# Altium PCB 3PDT.PcbDoc
Units mil, origin at the board's own origin, x right, y up, seen from the top; angles counter-clockwise.
Board outline 1450 x 736.25 mil, 2 copper layers (Top Layer, Bottom Layer); 2 components, 8 nets, 21 pads, 0 vias.
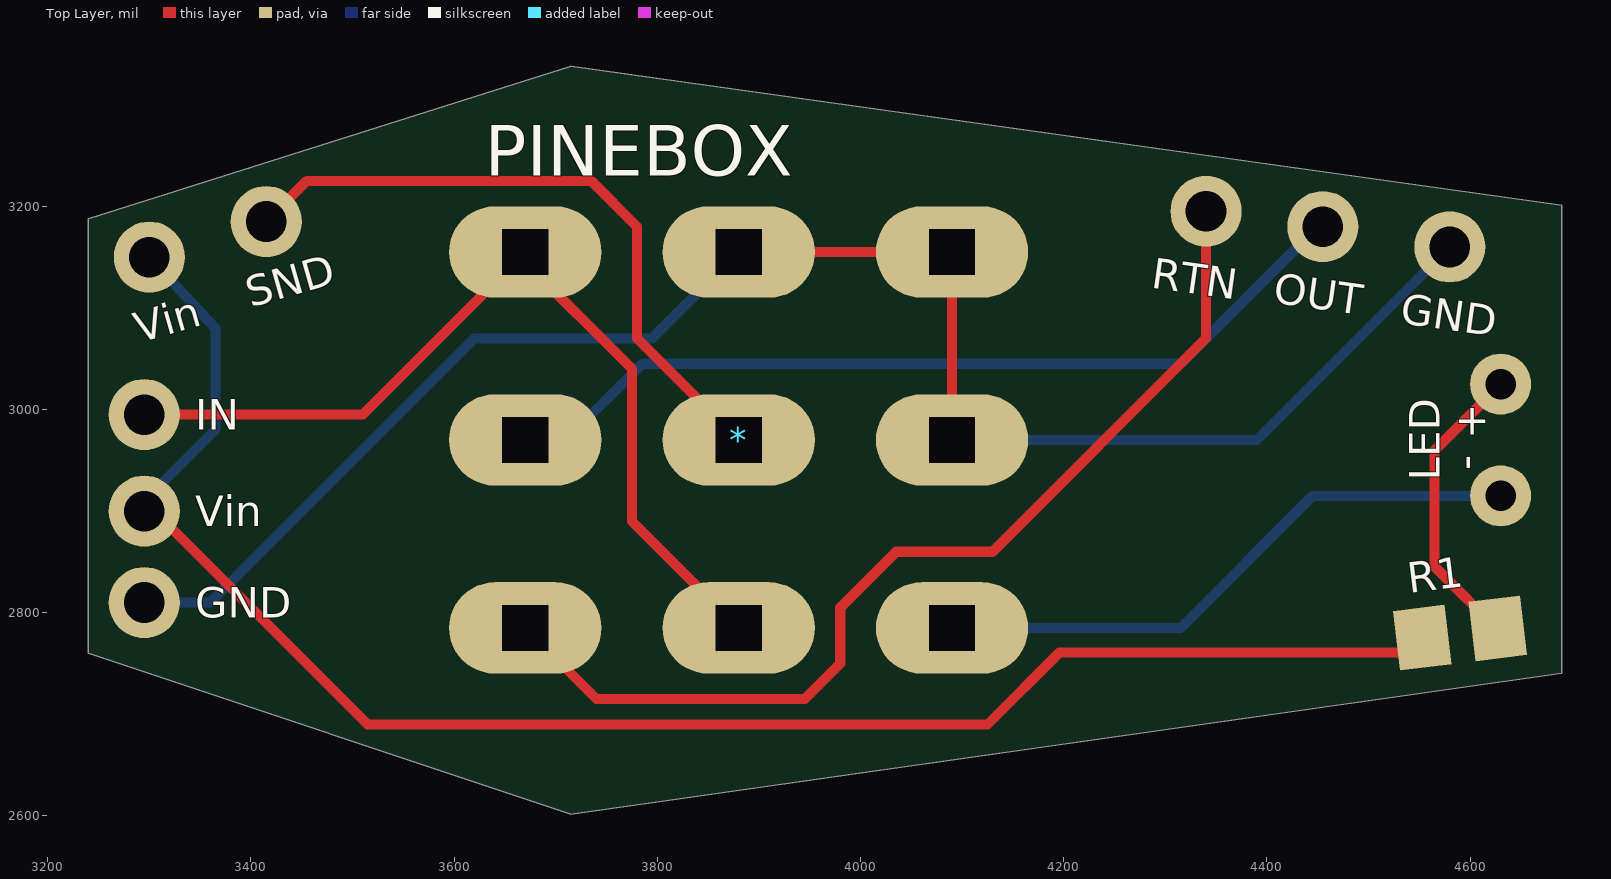
[diagram p0: Top Layer view]
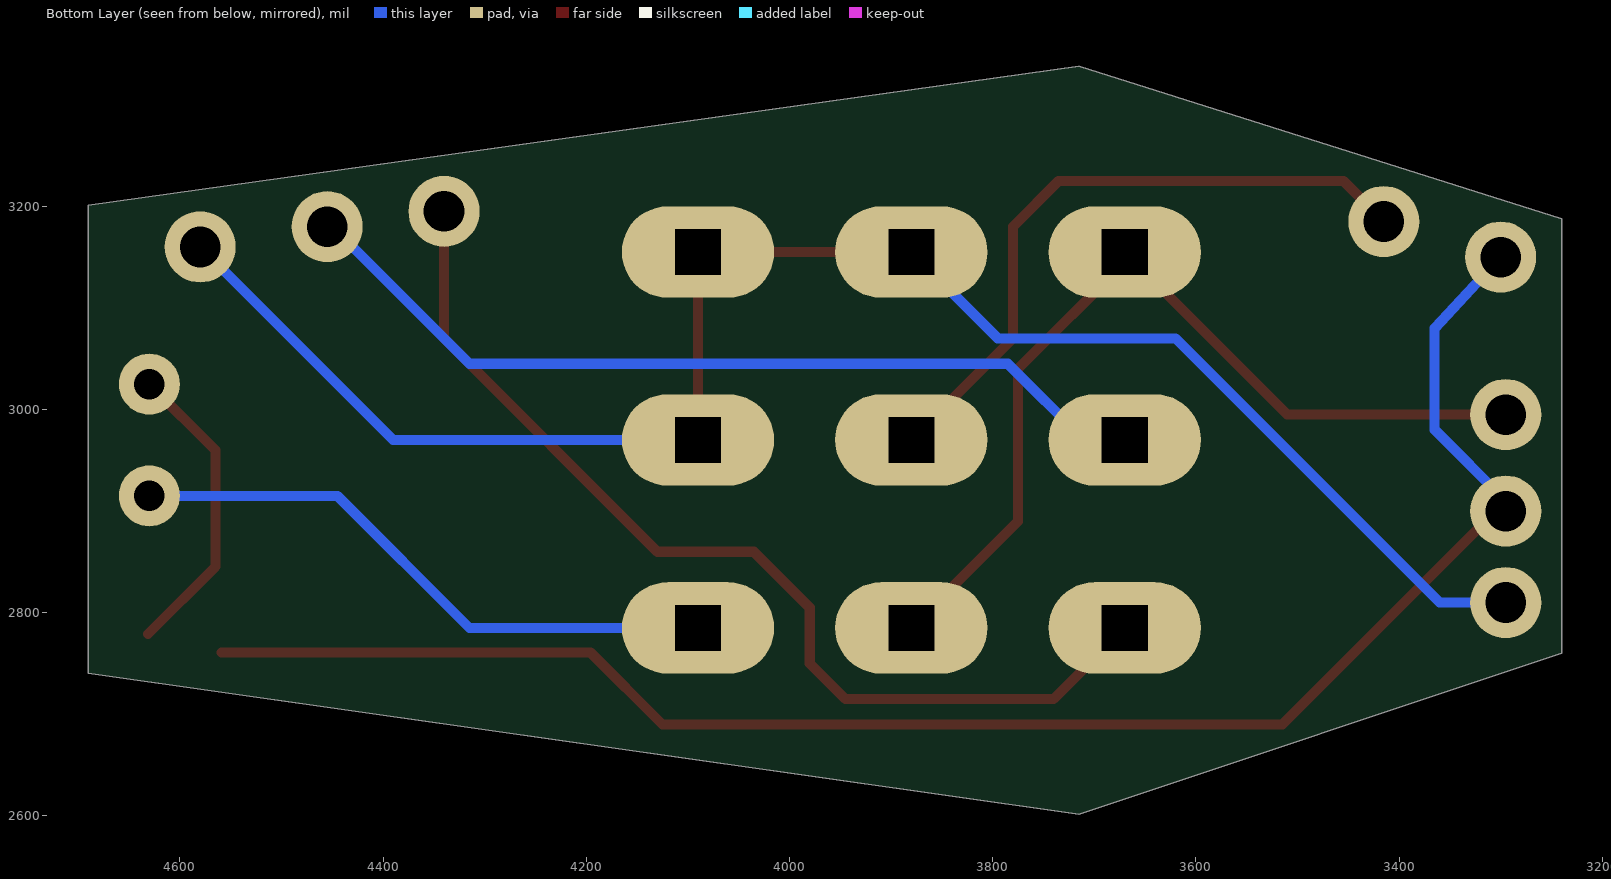
[diagram p1: Bottom Layer view, seen from below]

## Layer stack, top to bottom
Top Solder: solder mask 0.4, Solder Resist, Dk 3.5
Top Layer: signal copper 1.4
Dielectric 1: dielectric 12.6, FR-4, Dk 4.8
Bottom Layer: signal copper 1.4
Bottom Solder: solder mask 0.4, Solder Resist, Dk 3.5

## Board outline
4690,3201.23 3715,3337.68 3240,3187.92 3240,2760.27 3715,2601.42 4690,2740.54

## Design rules (kind name [scope] priority, off if disabled: settings)
Clearance [All] p1: gap=10 ignorepadtopadclearanceinfootprint=FALSE except(0: Arc-Hole Track-Hole SMDPad-Hole THPad-Hole Via-Hole Fill-Hole Poly-Hole Region-Hole Text-Hole)
Height [All] p1: minheight=0 maxheight=5000 prefheight=500
PolygonConnect [All] p1: connectstyle=Relief reliefconductorwidth=10 reliefentries=4 polygonreliefangle="90 Angle" airgapwidth=10
RoutingVias [All] p1: holewidth=28 width=50 viastyle="Through Hole" minholewidth=28 minwidth=50 maxholewidth=28 maxwidth=50
SolderMaskExpansion [All] p1: expansion=4
Width [All] p1: maxlimit=10 minlimit=10 preferedwidth=10
29 further rules are at their usual default settings.

## Components (designator, comment, footprint, x,y, rotation, side; value= is the part's Value field where it differs from the comment)
* "3PDT" 3PDT 3880,3155 r180 top
R1 "ERA6Y" ERA-0805 4590,2780 r187 top

## Footprints (in the part's own frame and the unit in brackets; to place one, negate y for a bottom-side part, rotate by r counter-clockwise, add the part's x,y. Pads: shape width x height; smd on the part's side, far side on the other; paste and mask are expansions set on the pad)
3PDT [mil]
  oval 150x90 hole 45 square: 1(-210,370) 2(-210,185) 3(-210,0) 4(0,370) 5(0,185) 6(0,0) 7(210,370) 8(210,185) 9(210,0)
  body extent -387,-150 385,520, height 1567
ERA-0805 [mm] "Chip Resistor; Body 2 x 1.3 mm (LxW typ)"
  rect 1.3x1.5 smd: 1(-0.95,0) 2(0.95,0)

## Part data
R1: "Rectangular Thick Film Chip Resistor, 10 Ohm to 1M Ohm Range, 0.1% and 0.5% Tolerance, 0805 Size, 0.1 W", PackageDocument=Mar-2003, Code_IPC="2012 [0805]", ComponentLink1Description="Manufacturer Link", ComponentLink1URL=http://www.panasonic.com/industrial/components/resistive_products.htm, ComponentLink2Description=Datasheet, ComponentLink2URL=http://www.panasonic.com/industrial/components/pdf/AOA0000CE8.pdf, LatestRevisionDate=19-Mar-2004, LatestRevisionNote="Silkscreen size reduced.", Note="If flow soldering, adjust pad width of PCB Footprint to 0.7 - 0.8 times the width of the resistor.", PackageReference=ERA-0805, Published=17-Dec-2003, Publisher="Altium Limited"

## Free pads (board coordinates)
  round 70 hole 40: 6(3295,2810) 6(3295,2900) 6(3295,2995) 6(3300,3150) 6(3415,3185) 6(4340,3195) 6(4455,3180) 6(4580,3160)
  round 60 hole 30: 7(4630,2915) 8(4630,3025)

## Nets (pads, with @x,y where several pads share a name; then routed paths per layer and width w, separated by ;. In a path a pad name is that pad's centre, name@x,y a point inside that pad or via, vN(x,y) a via of type N, cw(c..) or ccw(c..) an arc to the next point about the centre after c; other vN are vias at no path point)
GND: *.2 *.3 *.6 pad.6@3295,2810 pad.6@4580,3160 | length 1712
  Top Layer w10: *.6 *.3 *.2
  Bottom Layer w10: pad.6@3295,2825 3310,2810 3360,2810 3620,3070 3795,3070 *.6 ; *.2 4390,2970 4580,3160 pad.6@4590,3170
IN: *.4 *.9 pad.6@3295,2995 | length 898.3
  Top Layer w10: pad.6@3295,2995 3510,2995 *.9 3670,3145 3775,3040 3775,2890 *.4
LED+: pad.8 R1.1 | length 300.3
  Top Layer w10: pad.8 4565,2960 4565,2845.34 R1.1@4631.29,2779.05
LED-: *.1 pad.7 | length 593.8
  Bottom Layer w10: *.1 4315,2785 4445,2915 pad.7
OUT: *.8 pad.6@4455,3180 | length 895.3
  Bottom Layer w10: *.8 3710,2970 3785,3045 4315,3045 pad.6@4470,3200
RTN: *.7 pad.6@4340,3195 | length 1003.3
  Top Layer w10: *.7 3740,2715 3945,2715 3980,2750 3980,2805 4035,2860 4130,2860 4340,3070 pad.6@4340,3195
SND: *.5 pad.6@3415,3185 | length 651.6
  Top Layer w10: pad.6@3415,3185 3455,3225 3735,3225 3780,3180 3780,3070 *.5
Vin: pad.6@3295,2900 pad.6@3300,3150 R1.2 | length 1678.7
  Top Layer w10: pad.6@3295,2910 3515,2690 4125,2690 4195.95,2760.95 R1.2@4558.71,2760.95
  Bottom Layer w10: pad.6@3295,2910 3365,2980 3365,3080 pad.6@3300,3150

## Silkscreen, mask and mechanical layers (free items; w line width, h text height)
Top Overlay:
  text "PINEBOX" at 3630,3230 h50
  text "RTN" at 4285,3120 h30 r352
  text "OUT" at 4405,3105 h30 r352
  text "SND" at 3400,3100 h30 r16
  text "GND" at 4530,3085 h30 r352
  text "Vin" at 3290,3065 h30 r16
  text "IN" at 3345,2980 h30
  text "+" at 4585,2975 h30
  text "-" at 4610,2940 h30 r90
  text "LED" at 4570,2930 h30 r90
  text "Vin" at 3345,2885 h30
  text "GND" at 3345,2795 h30